# Altium PCB MainBoard.PcbDoc
Units mil, origin at the board's own origin, x right, y up, seen from the top; angles counter-clockwise.
Board outline 1122 x 925 mil, 2 copper layers (Top1, Bottom4), stack 42.17 mil thick; 52 components, 58 nets, 260 pads, 115 vias.
Unrouted connection lines stored in the file: 80.
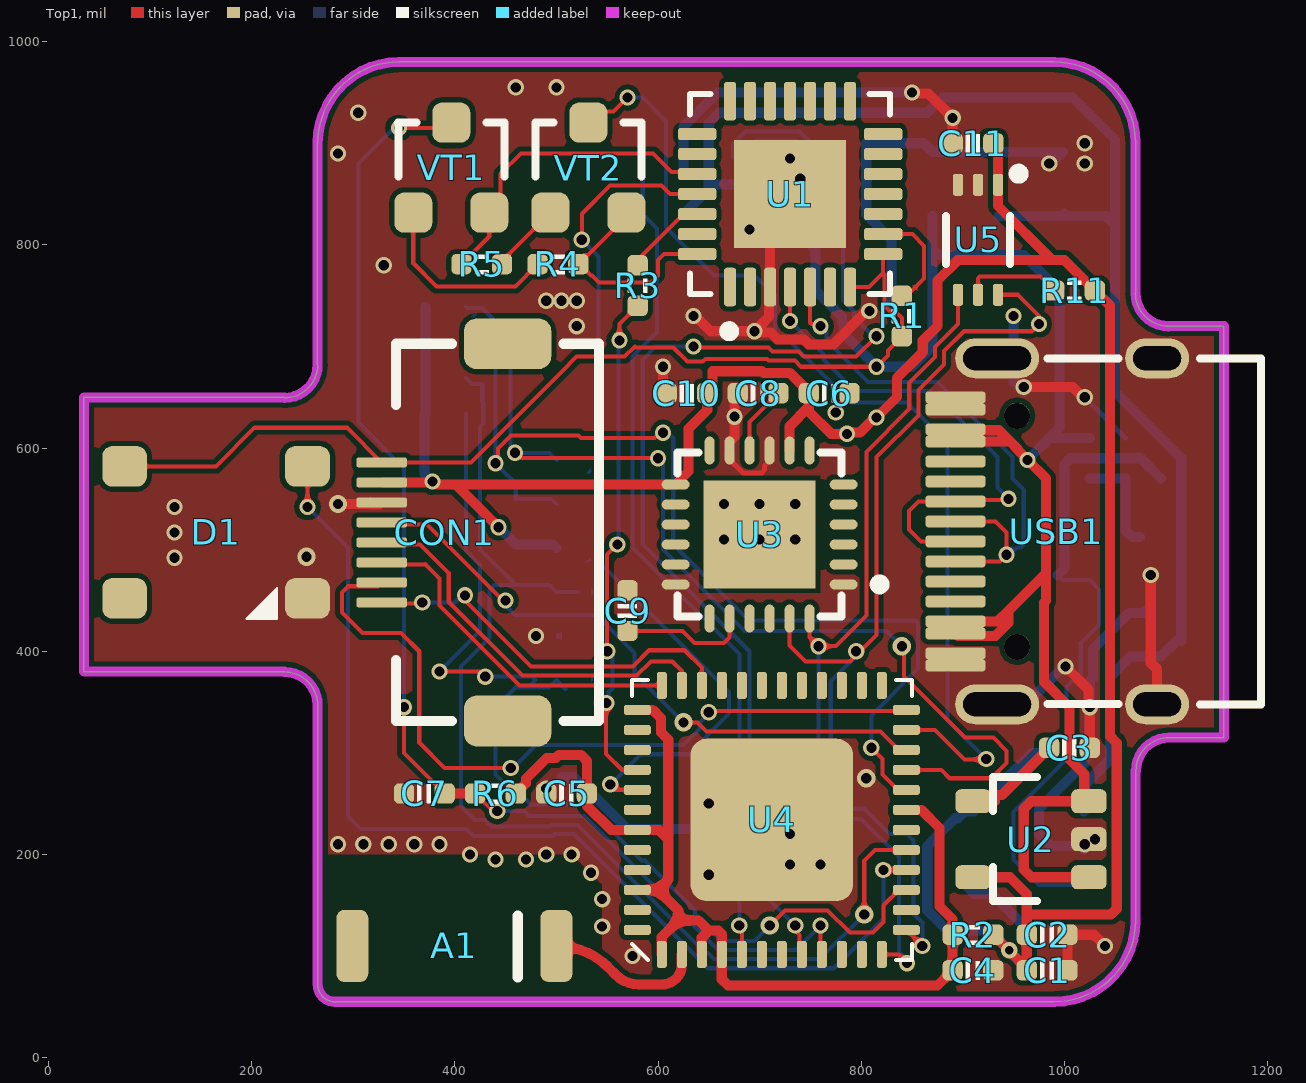
[diagram p0: Top1 view]
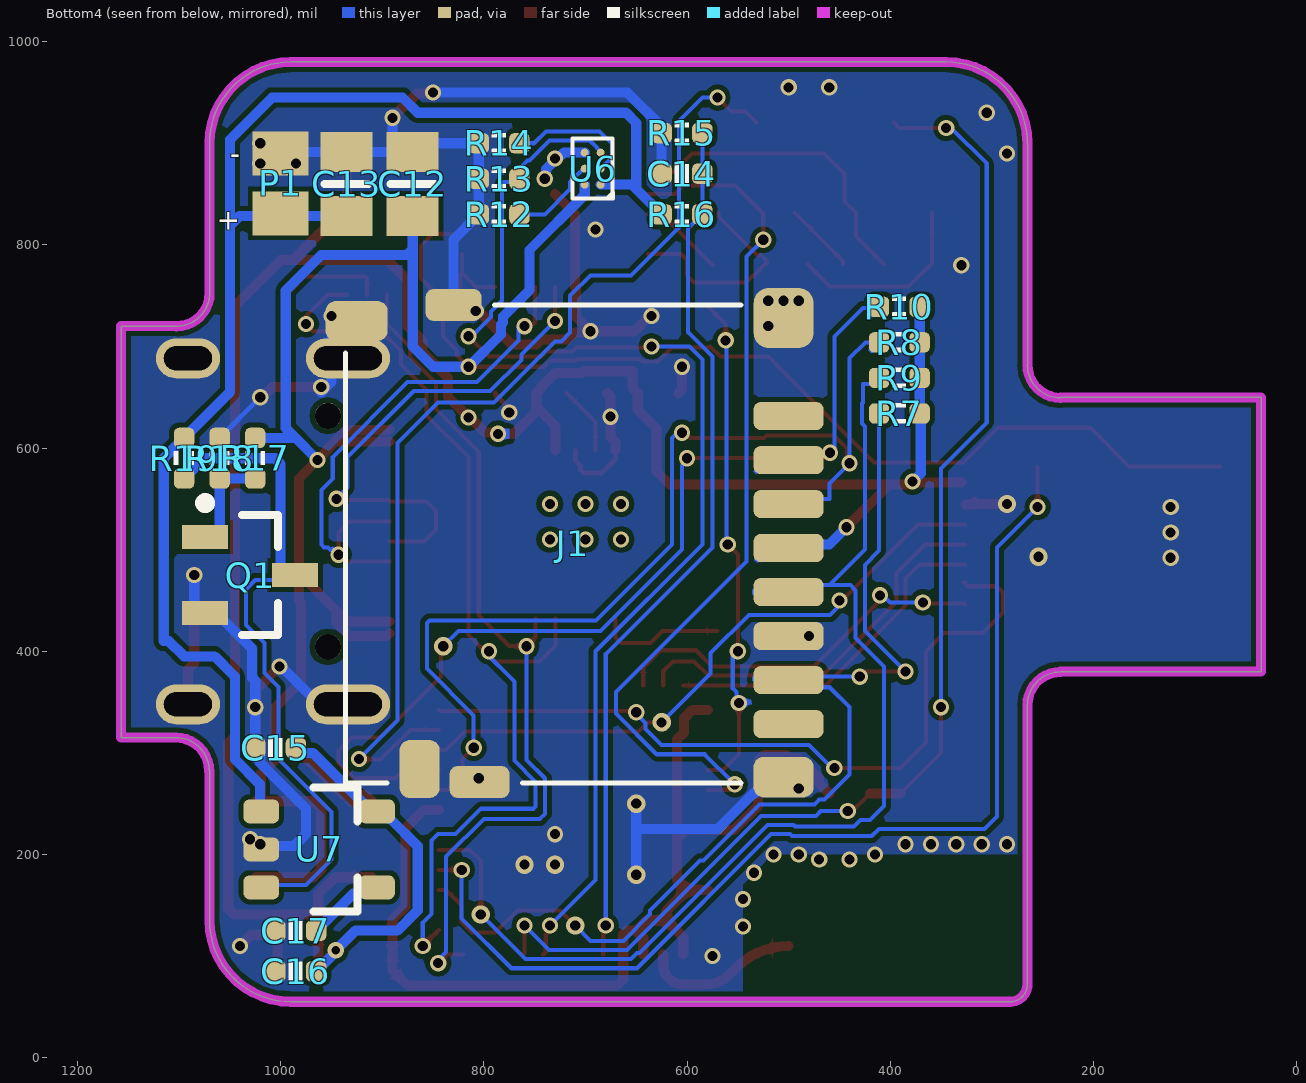
[diagram p1: Bottom4 view, seen from below]
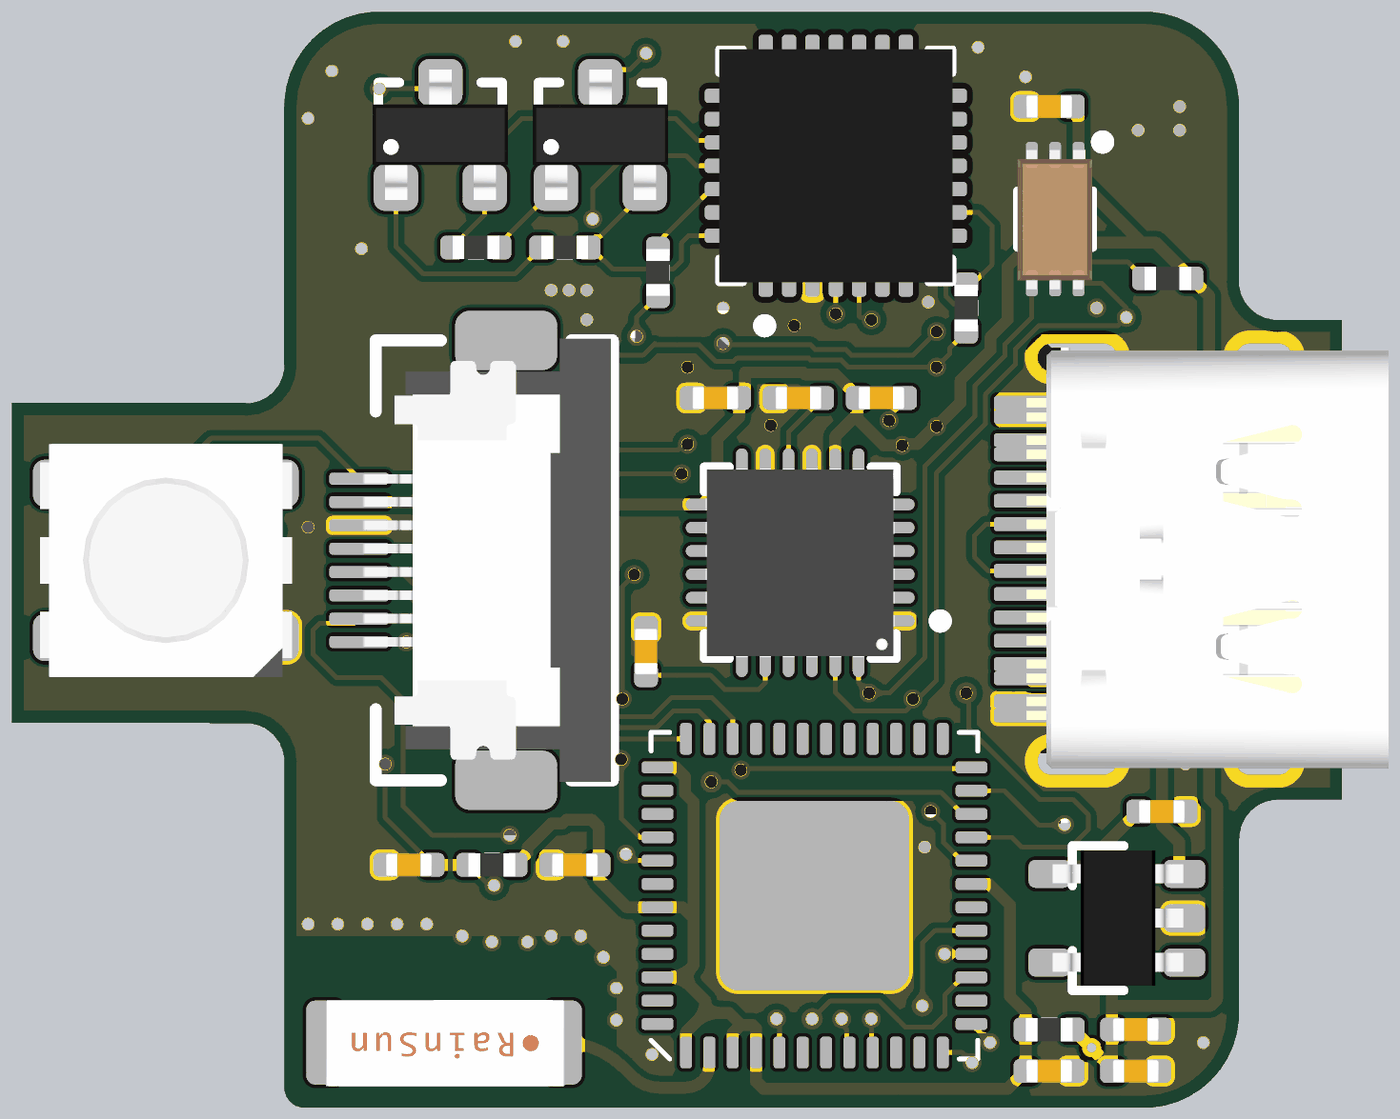
[diagram p2: 3D render of the assembled board from above, using the file's embedded part models]
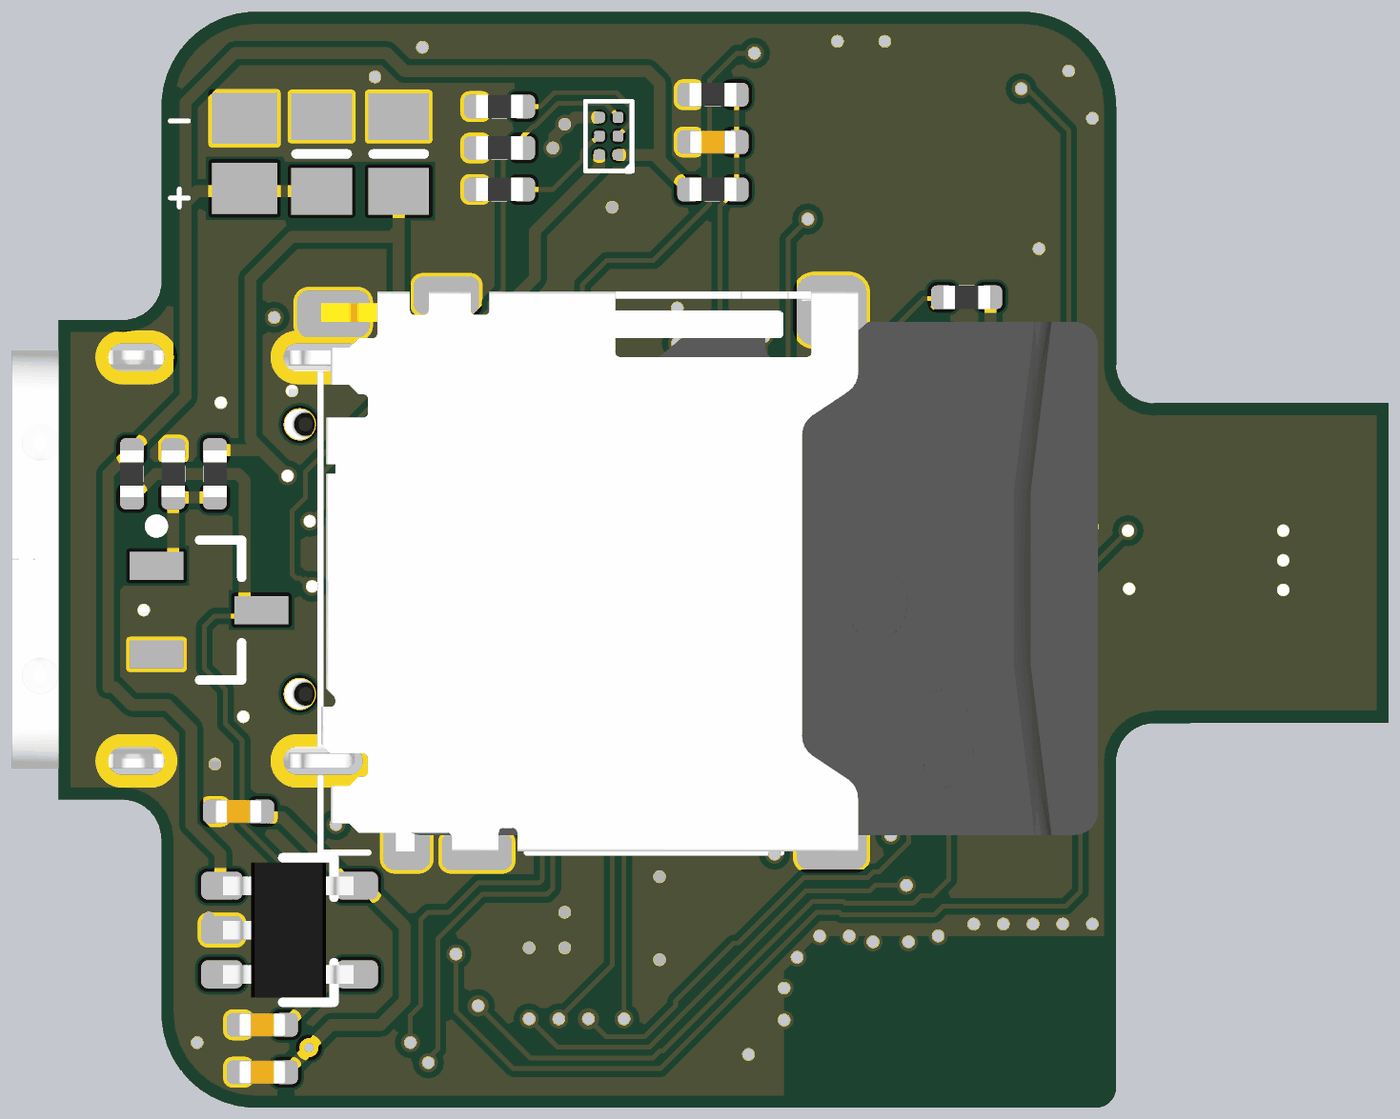
[diagram p3: 3D render of the assembled board from below, using the file's embedded part models]

## Layer stack, top to bottom
Top Solder: solder mask 0.4, Solder Resist, Dk 3.5
Top1: signal copper 1.4
Dielectric 2: core 39.37, PP-006, Dk 4.2
Bottom4: signal copper 1.4
Bottom Solder: solder mask 0.4, Solder Resist, Dk 3.5

## Board outline
232.4,379.6 cw(c232.4,347) 265,347 265,72.07 ccw(c282.07,72.07) 282.07,55 990,55 ccw(c990,135) 1070,135 1070,282.4 1070.4,282.4 cw(c1103,282.4) 1103,315 1157,315 1157,720 1102.5,720 1102.5,719.9 cw(c1102.5,752.5) 1069.9,752.5 1070,752.5 1070,900 ccw(c990,900) 990,980 345,980 ccw(c345,900) 265,900 264.82,900 264.82,682 265,682 cw(c232.4,682) 232.4,649.4 232.4,649.82 35,649.82 35,380

## Design rules (kind name [scope] priority, off if disabled: settings)
Clearance [All] p1: gap=5 ignorepadtopadclearanceinfootprint=FALSE
ComponentClearance [All] p1: gap=0 collisioncheckmode=3 verticalgap=0 showdistances=FALSE
DiffPairsRouting [All] p1: maxlimit=9 minlimit=9 mostfreqgap=9 toplayer_minwidth=4 toplayer_maxwidth=4 toplayer_prefwidth=4 bottomlayer_minwidth=4 bottomlayer_maxwidth=4 bottomlayer_prefwidth=4 maxuncoupledlength=500
FanoutControl Fanout_BGA [All] p1: bgadir=Out bgaviamode=Centered fanoutstyle=Auto fanoutdirection=Alternating viagrid=1 // Fanout_BGA (Default Rule)
HoleSize [All] p1: absolutevalues=TRUE maxlimit=10000 minlimit=8 maxpercent=80.000 minpercent=20.000
MinimumSolderMaskSliver [All] p1 off: minsoldermaskwidth=2
PlaneClearance [All] p1: clearance=8
PlaneConnect [All] p1: planeconnectstyle=Direct reliefexpansion=20 reliefentries=4 reliefconductorwidth=10 reliefairgap=10
PolygonConnect [All] p1: connectstyle=Direct reliefconductorwidth=10 reliefentries=4 polygonreliefangle="90 Angle" airgapwidth=10
RoutingVias [All] p1: holewidth=8 width=16 viastyle="Through Hole" minholewidth=6 minwidth=12 maxholewidth=28 maxwidth=50
SilkToBoardRegionClearance [All] p1 off:
SilkToSilkClearance [All] p1: silktosilkclearance=0
SilkToSolderMaskClearance [IsPad] p1: minsilkscreentomaskgap=0 clearancetoexposedcopper=TRUE
SolderMaskExpansion [All] p1: expansion=3
Width [All] p1: maxlimit=10000 minlimit=4 preferedwidth=4
20 further rules are at their usual default settings.

## Components (designator, comment, footprint, x,y, rotation, side; value= is the part's Value field where it differs from the comment)
A1 "RAINSUN" ANT-Rainsun-AN5120 400,110 r180 top
C1 "0.1uF" CAP_0402 983,86 r180 top value=0.1u
C2 "10uF" CAP_0402 983,121 r180 top value=0.1u
C3 "10nF" CAP_0402 1005,305 r180 top value=0.1u
C4 "10uF" CAP_0402 910,86 r180 top value=0.1u
C5 "0.1uF" CAP_0402 510,260 r0 top value=0.1u
C6 "10nF" CAP_0402 768.5,654 r0 top value=0.1u
C7 "0.1uF" CAP_0402 370,260 r180 top value=0.1u
C8 "0.1uF" CAP_0402 698.5,654 r180 top value=0.1u
C9 "2.2nF" CAP_0402 570,440 r270 top value=0.1u
C10 "0.1uF" CAP_0402 628.5,654 r0 top value=0.1u
C11 "0.1uF" CAP_0402 910,900 r180 top value=0.1u
C12 "Cap Pol1" 6-0805_L 870,860 r90 bottom value=1uf
C13 "Cap Pol1" 6-0805_L 935,860 r90 bottom value=1uf
C14 "0.1uf" CAP_0402 605,870 r180 bottom value=0.1u
C15 "10uF" CAP_0402 1005,305 r180 bottom value=0.1u
C16 "0.1uF" CAP_0402 985,85 r180 bottom value=0.1u
C17 "10nF" CAP_0402 985,125 r180 bottom value=0.1u
CON1 "FFC_0.5_8" FFC_0.5_8 417,517 r90 top
D1 "RGB" LED_5050_WS2812B 165,517 r0 top
J1 "TF-Socket" "TF-Card-Amphenol with TF" 500,501.61 r90 bottom locked
P1 "Battery" C0805 1000,860.47 r270 bottom
Q1 "NPN" SOT-23_N 1030,475 r180 bottom
R1 "10K" RES_0402 840,730 r90 top value=22R
R2 "0R" RES_0402 910,121 r180 top value=22R
R3 "200R" RES_0402 580,760 r90 top value=22R
R4 "12K" RES_0402 501.5,781 r180 top value=22R
R5 "12K" RES_0402 426.5,781 r0 top value=22R
R6 "10K" RES_0402 440,260 r180 top value=22R
R7 "10K" RES_0402 391,634 r0 bottom value=22R
R8 "10K" RES_0402 391,704 r0 bottom value=22R
R9 "10K" RES_0402 391,669 r0 bottom value=22R
R10 "10K" RES_0402 391,739 r0 bottom value=22R
R11 "10K" RES_0402 1010,755 r0 top value=22R
R12 "1.35K" RES_0402 785,830 r0 bottom value=22R
R13 "6K" RES_0402 785,865 r0 bottom value=22R
R14 "10K" RES_0402 785,900 r0 bottom value=22R
R15 "10K" RES_0402 605,910 r0 bottom value=22R
R16 "33K" RES_0402 605,830 r180 bottom value=22R
R17 "4K" RES_0402 1025,590 r270 bottom value=22R
R18 "6K" RES_0402 1060,590 r90 bottom value=22R
R19 "10K" RES_0402 1095,590 r270 bottom value=22R
U1 "CP2102" QFN-28 730,850 r90 top value=Value
U2 "LP2992 3V3" SOT23-5 965,215 r180 top
U3 "MPU6050" QFN-24 700,515 r180 top
U4 "ESP32_SIP" QFN-48_7X7 712,234 r90 top
U5 "BH1750FVI-TR" BH1750FVI 915,805 r270 top
U6 "BQ2510" BQ2510 696.06,873.42 r90 bottom
U7 "LP2992 3V3" SOT23-5 960,205 r180 bottom
USB1 "Type-C" Type-C-TOP 992,518 r0 top
VT1 "S8050" SMT_TRIODE_NPN 396.5,876 r0 top
VT2 "S8050" SMT_TRIODE_NPN 531.5,876 r0 top

## Footprints (in the part's own frame and the unit in brackets; to place one, negate y for a bottom-side part, rotate by r counter-clockwise, add the part's x,y. Pads: shape width x height; smd on the part's side, far side on the other; paste and mask are expansions set on the pad)
6-0805_L [mm] "Chip Resistor, Body 2.0x1.2mm, IPC High Density"
  rect 1x1.3 smd: 1(-0.8,0) 2(0.8,0)
  silkscreen extent 0,-0.55 0,0.55, body extent -1.07,-0.7 1.07,0.7, height 0.7
ANT-Rainsun-AN5120 [mm] "选择焊盘"
  rrect50% 0.8x1.8 smd: 1(-2.54,0) ""(2.563,0)
  silkscreen extent -1.57,-0.76 -1.57,0.79, body extent -2.57,-0.91 2.54,0.94, height 1.32
BH1750FVI [mm]
  rrect50% 0.55x0.25 smd paste+0 mask+0: 1(-1.375,0.5) 2(-1.375,0) 3(-1.375,-0.5) 4(1.375,-0.5) 5(1.375,0) 6(1.375,0.5)
  silkscreen extent -1.78,-0.8 0.6,1.14, body extent -1.49,-0.81 1.51,0.79, height 0.77
BQ2510 [mm]
  round 0.2 smd: A1(-0.36,-0.281) A2(-0.36,0.119) B1(0.04,-0.281) B2(0.04,0.119) C1(0.44,-0.281) C2(0.44,0.119)
  silkscreen extent -0.71,-0.58 0.79,0.42
C0805 [mm] "Chip Capacitor, Body 2.0x1.3mm, IPC High Density"
  rect 1.1x1.4 smd: 1(-0.75,0) 2(0.75,0)
  body extent -1.1,-0.72 1.1,0.72, height 1.4
CAP_0402 [mil]
  rrect50% 20x20 smd: 1(-20,0) 2(20,0)
  silkscreen extent -7,-9 7,9, body extent -20,-10 20,10, height 20
FFC_0.5_8 [mil]
  rrect50% 50x86 smd: 0(-185.63,-35) 0(185.63,-35)
  rrect50% 10x50 smd: 1(-68.9,89) 2(-49.21,89) 3(-29.53,89) 4(-9.84,89) 5(9.84,89) 6(29.53,89) 7(49.21,89) 8(68.9,89)
  silkscreen extent -186,-125 186,75, body extent -187,-124 187,87, height 82
LED_5050_WS2812B [mil]
  rrect50% 44x40 smd: 1(-90,65) 2(-90,-65) 3(90,-65) 4(90,65)
  silkscreen extent 30,-85 60,-55, body extent -106,-98 106,98, height 69
QFN-24 [mm] "QFN, 24-Leads, Body 4.1x4.1mm (max), Pitch 0.50mm, IPC Low Density"
  oval 0.7x0.25 smd: 1(-2.1,1.25) 2(-2.1,0.75) 3(-2.1,0.25) 4(-2.1,-0.25) 5(-2.1,-0.75) 6(-2.1,-1.25) 13(2.1,-1.25) 14(2.1,-0.75) 15(2.1,-0.25) 16(2.1,0.25) 17(2.1,0.75) 18(2.1,1.25)
  oval 0.25x0.7 smd: 7(-1.25,-2.1) 8(-0.75,-2.1) 9(-0.25,-2.1) 10(0.25,-2.1) 11(0.75,-2.1) 12(1.25,-2.1) 19(1.25,2.1) 20(0.75,2.1) 21(0.25,2.1) 22(-0.25,2.1) 23(-0.75,2.1) 24(-1.25,2.1)
  rect 2.8x2.7 smd: ""(0,0)
  silkscreen extent -3.13,-2.05 2.05,2.05, body extent -2.02,-2.02 2.02,2.02, height 0.95
QFN-28 [mil]
  rrect50% 38x12 smd mask+5: 1(-91.5,59.06) 2(-91.5,39.37) 3(-91.5,19.69) 4(-91.5,0) 5(-91.5,-19.68) 6(-91.5,-39.37) 7(-91.5,-59.05) 15(91.5,-59.05) 16(91.5,-39.37) 17(91.5,-19.68) 18(91.5,0) 19(91.5,19.69) 20(91.5,39.37) 21(91.5,59.06)
  rrect50% 12x38 smd mask+5: 8(-59.05,-91.5) 9(-39.37,-91.5) 10(-19.68,-91.5) 11(0,-91.5) 12(19.69,-91.5) 13(39.37,-91.5) 14(59.06,-91.5) 22(59.06,91.5) 23(39.37,91.5) 24(19.69,91.5) 25(0,91.5) 26(-19.68,91.5) 27(-39.37,91.5) 28(-59.05,91.5)
  rect 106.3x110.24 smd: 29(0,0)
  silkscreen extent -140,-99 98,98, body extent -98,-98 98,98, height 35
QFN-48_7X7 [mm]
  rrect20% 4.064x4.064 smd: 0(0,0)
  rrect50% 0.675x0.25 smd: 1(-3.363,2.75) 2(-3.363,2.25) 3(-3.363,1.75) 4(-3.363,1.25) 5(-3.363,0.75) 6(-3.363,0.25) 7(-3.363,-0.25) 8(-3.363,-0.75) 9(-3.363,-1.25) 10(-3.363,-1.75) 11(-3.363,-2.25) 12(-3.363,-2.75) 25(3.362,-2.75) 26(3.362,-2.25) 27(3.362,-1.75) 28(3.362,-1.25) 29(3.362,-0.75) 30(3.362,-0.25) 31(3.362,0.25) 32(3.362,0.75) 33(3.362,1.25) 34(3.362,1.75) 35(3.362,2.25) 36(3.362,2.75)
  rrect50% 0.25x0.675 smd: 13(-2.75,-3.363) 14(-2.25,-3.363) 15(-1.75,-3.363) 16(-1.25,-3.363) 17(-0.75,-3.363) 18(-0.25,-3.363) 19(0.25,-3.363) 20(0.75,-3.363) 21(1.25,-3.363) 22(1.75,-3.363) 23(2.25,-3.363) 24(2.75,-3.363) 37(2.75,3.362) 38(2.25,3.362) 39(1.75,3.362) 40(1.25,3.362) 41(0.75,3.362) 42(0.25,3.362) 43(-0.25,3.362) 44(-0.75,3.362) 45(-1.25,3.362) 46(-1.75,3.362) 47(-2.25,3.362) 48(-2.75,3.362)
  silkscreen extent -3.5,-3.5 3.5,3.5, body extent -3.5,-3.5 3.5,3.5, height 1
RES_0402 [mil]
  rrect50% 20x20 smd: 1(-20,0) 2(20,0)
  silkscreen extent -7,-10 7,10, body extent -20,-10 20,10, height 14
SMT_TRIODE_NPN [mm] "Surface mount NPN transistor, package SOT-23"
  rrect50% 0.95x1 smd: 1(-0.95,-1.125) 2(0.95,-1.125) 3(0,1.125)
  silkscreen extent -1.33,-0.23 1.32,1.12, body extent -1.45,-1.4 1.45,1.4, height 1.3
SOT23-5 [mm] "SOT23, 3-Leads, Body 3.1x3.0mm (max), Pitch 0.95mm, IPC Medium Density"
  rrect50% 0.889x0.6 smd: 1(-1.5,0.95) 2(-1.5,0) 3(-1.5,-0.95) 4(1.396,-0.95) 5(1.396,0.95)
  silkscreen extent -0.2,-1.55 0.9,1.55, body extent -1.48,-1.45 1.32,1.45, height 1.2
SOT-23_N [mm] "SOT23, 3-Leads, Body 2.9x1.3mm, Pitch 0.95mm, Lead Span 2.5mm, IPC Medium Density"
  rect 1.15x0.6 smd: 1(-1.125,0.95) 2(-1.125,-0.95) 3(1.125,0)
  silkscreen extent -1.25,-1.5 0.7,1.92, body extent -0.7,-1.5 0.7,1.5, height 1.1
"TF-Card-Amphenol with TF" [mm]
  rrect50% 0.7x1.75 smd: 1(3.3,0) 2(2.2,0) 3(1.1,0) 4(0,0) 5(-1.1,0) 6(-2.2,0) 7(-3.3,0) 8(-4.4,0)
  rrect50% 1x1.55 smd: 9(5.675,10.8)
  rrect50% 1.45x1 smd: 10(-5.525,9.225)
  rrect50% 1.5x1.5 smd: S1(5.75,0.125)
  rrect50% 1.016x1.5 smd: S2(-5.727,0.125)
  rrect50% 0.8x1.4 smd: S3(6.075,8.375)
  rrect50% 0.8x1.5 smd: S4(-5.85,7.725)
  silkscreen extent -5.87,1.19 6.07,11.07, body extent -5.85,-5.58 6.15,11.06, height 1.69
Type-C-TOP [mm]
  round 0.65 hole 0.65: 0(-0.98,-2.89) 0(-0.98,2.89)
  oval 1.6x1 hole 0.6 slot 1.2 at 0 deg: 1(2.52,4.325) 2(2.52,-4.325)
  oval 2.1x1 hole 0.6 slot 1.7 at 0 deg: 3(-1.48,-4.325) 4(-1.48,4.325)
  rrect50% 1.5x0.3 smd: A1(-2.52,-3.35) A4(-2.52,-2.55) A5(-2.52,-1.25) A6(-2.52,-0.25) A7(-2.52,0.25) A8(-2.52,1.25) A9(-2.52,2.55) A12(-2.52,3.35) B1(-2.52,3.05) B4(-2.52,2.25) B5(-2.52,1.75) B6(-2.52,0.75) B7(-2.52,-0.75) B8(-2.52,-1.75) B9(-2.52,-2.25) B12(-2.52,-3.05)
  silkscreen extent -0.22,-4.33 5.12,4.33, body extent -2.57,-4.48 5.18,4.48, height 3.26

## Part data
A1: library part ANT-Rainsun-AP5120
C1 C2 C3 C4 C5 C6 C7 C8 C9 C10 C11 C14 C15 C16 C17: library part ??-0402, "Capacitor"
C12 C13: "Polarized Capacitor (Radial)", LatestRevisionDate=17-Jul-2002, LatestRevisionNote="Re-released for DXP Platform.", PackageDescription="Polarized Capacitor (Radial); 2 Leads", PackageReference=RB7.6-15, Published=8-Jun-2000, Publisher="Altium Limited"
CON1: "FFC", System=Connector
D1: library part LED_5050_WS2812B, "LED", Type=5050
J1: "10 _8 + 2_ Position Card Connector Secure Digital - microSD™ Surface Mount, Right Angle Gold", Package=None, Availability=Unavailable, MF="Amphenol Commercial Products", MP=1140084168, Price=None, SnapEDA_Link=https://www.snapeda.com/parts/1140084168/Amphenol/view-part/4544529/?ref=snap
P1: library part "Header 2", "Header, 2-Pin", LatestRevisionDate=17-Jul-2002, LatestRevisionNote="Re-released for DXP Platform.", Publisher="Altium Limited"
Q1: "NPN Bipolar Transistor", Code_JEDEC=TO-226-AA, LatestRevisionDate=17-Jul-2002, LatestRevisionNote="Re-released for DXP Platform.", PackageDescription="TO, Flat Index; 3 In-Line, Axial Leads; Body Dia. 4.8mm; Leads 0.55 x 0.51 mm (max)", PackageReference=TO-226-AA, Published=8-Jun-2000, Publisher="Altium Limited"
R1 R2 R3 R4 R5 R6 R7 R8 R9 R10 R11 R12 R13 R14 R15 R16 R17 R18 R19: library part ??-0402, "Resistor"
U1: "USB?TTL", MFG #1="SILICON LABS", PART DESC="SINGLE-CHIP USB TO UART BRIDGE, QFN28, RoHS.", PART NUMBER=CP2102, RefDes=RefDes, Type=DEV
U2 U7: library part LP2992, "LDO"
U3: "?????"
U4: library part ESP32-PICO
USB1: library part USB-Type-C-TOP
VT1 VT2: library part SMT_TRIODE_NPN, "Surface mount NPN transistor, package SOT-23"

## Via types
v1: diameter 16, hole 10, Top1 to Bottom4, tented both sides, 103 vias
v2: diameter 18, hole 10, Top1 to Bottom4, tented both sides, 11 vias
v3: diameter 16, hole 8, Top1 to Bottom4, 1 vias

## Nets (pads, with @x,y where several pads share a name; then routed paths per layer and width w, separated by ;. In a path a pad name is that pad's centre, name@x,y a point inside that pad or via, vN(x,y) a via of type N, cw(c..) or ccw(c..) an arc to the next point about the centre after c; other vN are vias at no path point)
3V3: C1.2 C2.2 C6.1 C10.2 C11.1 C15.2 C16.2 CON1.7 J1.4 R2.1 R7.1 R8.1 R9.1 R10.1 R11.2 U2.5 U3.8 U3.13 U5.1 U7.5 | length 2684.4
  Top1 w10: CON1.7@330,566.21 380.41,566.21 382.41,564.21 400.79,564.21 ; v1(443,522) 400.79,564.21 ; U3.8 729.53,621.53 748.5,640.5 ; U2.5 946.4,177.6 963,161 963,141 ; R2.1 945.5,105.5 C1.2@963,88 ; C11.1 934.68,895.32 U5.1 934.68,838.32 988,785 ; C1.2 C1.2@963,88 ; 400.79,564.21 U3.13 630,576.89 630,619 648.5,637.5 C10.2 653.5,659 653.5,675.66 702.22,675.66 703.88,674 729.71,674 743.5,660.21 743.5,659 C6.1 748.5,640.5 ; 748.5,640.5 748.5,636.04 770.55,614 v1(786,614) 787.15,615.15 798.52,615.15 813.38,630 v1(815,630) 835.26,650.26 835.26,669.04 860.61,694.39 860.61,705.61 875,720 875,765 895,785 988,785 ; C1.2@963,88 C2.2 963,141 ; 963,141 1046,141 1051.55,146.55 1051.55,309.66 1045,316.21 1045,740 R11.2 1000,785 988,785
  Bottom4 w10: R10.1 R8.1 R9.1 R7.1 370,633 370,575 v1@380,565 ; v1@445,520 460,505 496.62,505 J1.4 ; C16.2 945.73,104.27 v3(945.73,105.73) 926.46,125 885,125 865,145 865,208.04 892.87,235.9 894.75,235.9 895,235.66 901.74,242.4 U7.5 910.74,242.4 968.34,300 980,300 C15.2
  other v1: 378,567
3V3A: C4.2 C5.2 R2.2 R6.1 U4.1 U4.3 U4.4 U4.19 U4.37 U4.43 U4.46 | length 1070.7
  Top1 w10: R6.1 470,270 470,274.55 490.46,295 499.54,295 502.54,298 524.14,298 530,292.14 C5.2 530,248 553.84,224.16 U4.43 600.84,224.16 610,215 ; U4.46 599.9,165.1 ; U4.37 594.73,342.27 602.91,334.09 602.91,320.22 610,313.13 610,215 ; U4.1 603.73,118.73 620,135 ; U4.3 643.1,118.1 650,125 ; U4.19 859.16,243.84 877,226 877,149 890,136 R2.2 C4.2 875,71 669,71 662.79,77.21 U4.4 662.79,121.76 659.55,125 650,125 ; 599.9,165.1 610,175.21 610,215 ; 599.9,165.1 620,145 620,135 ; 620,135 640,135 650,125
BAT+: C13.1 P1.2 R16.1 R19.1 U6.A1 U7.1 | length 1434.9
  Bottom4 w10: R16.1 650,855 ; U6.A1 654.25,859.25 650,855 ; C13.1 P1.2@1002.44,828.5 ; P1.2 P1.2@1002.44,828.5 ; U7.1 1020.43,243.77 1020.43,269.21 1045,293.79 1045,375 1065,395 1095,395 1110,410 1115,410 1115,590 R19.1 1049.72,655.28 1049.72,819.14 ; 650,855 650,859.25 650,920 660,930 865,930 880,945 1008.35,945 1049.72,903.64 1049.72,819.14 ; P1.2@1002.44,828.5 1040.36,828.5 1049.72,819.14
BH_SCL: U3.23 U4.13 U5.6 | length 1017.6
  Top1 w4: U3.23 729.53,405.47 745,390 789,390 815,416 815,591 856.26,632.26 856.26,656.96 881.61,682.31 881.61,695.54 901.03,714.96 967.96,714.96 v1(975,722) 975,730 954.13,750.87 U5.6 ; U4.13 v1(860.11,110)
  Bottom4 w4: v1@800,400 770,370 770,292.27 749,271.27 749,247.34 751.34,245 802.73,245 827.73,220 845,220 851.41,213.59 851.41,141.62 860.11,132.91 v1(860.11,110)
  other v1: 795,400
BH_SDA: U3.24 U4.12 U5.4 | length 867.1
  Top1 w4: U3.24 749.21,413.79 v1(758,405) 775,405 805,435 805,596 847.26,638.26 847.26,664.07 872.61,689.42 872.61,699.27 895.31,721.98 U5.4 ; U4.12 836.38,101.62 v1(845,93)
  Bottom4 w4: v1(758,405) 758,293 740,275 740,240 745,235 800,235 837.05,197.95 837.05,104.2 845,96.25 v1(845,93)
CP_Rx: U1.25 U4.41 | length 855.2
  Top1 w4: v1(525,805) 525,830.62 552.78,858.39 603.61,858.39 612,850 U1.25 ; v1(553,269) 558.47,263.53 U4.41
  Bottom4 w4: v1(525,805) 541.6,788.4 541.6,488.4 670,360 670,338.79 629.82,298.61 582.61,298.61 v1(553,269)
CP_Tx: R3.1 U4.40 | length 495.1
  Top1 w4: v1(549,349) 549,299 564.79,283.21 U4.40 ; v1(550,400) 550,495 v1(560,505) ; v1(562,706) 562,722 R3.1
  Bottom4 w4: v1(549,349) 551.3,351.3 551.3,359.78 555,363.48 555,395 v1(550,400) ; v1(560,505) 561,506 561,705 v1(562,706)
DC: CON1.5 U4.22 | length 625
  Top1 w4: CON1.5@326,524.84 372.66,524.84 447.5,450 v1(450,450) ; v2(625,330) 638.79,330 647.79,321 819,321 837.1,302.9 U4.22
  Bottom4 w4: v1(450,450) 450,445 459.22,435.78 539.22,435.78 576.94,398.06 576.94,378.06 v2(625,330)
DTR: R4.1 U1.28 VT2.2 | length 217.5
  Top1 w4: VT2.2 568.9,827.69 531.21,790 527.19,790 521.5,784.31 R4.1 523.12,781 534.12,770 535,770 542,763 593,763 600,770 600,785 605.94,790.95 U1.28
EN: C7.1 R6.2 U4.9 VT1.3 | length 1237.4
  Top1 w4: v1(345,915) 391.21,915 VT1.3 ; v1(350,345) 350,300 C7.1 ; R6.2 441.83,238.17 v1(441.83,242.72) ; v1(760,130) 760,102.83 U4.9
  Top1 w10: C7.1 R6.2
  Bottom4 w4: v1@340,915 305,880 305,625 350,580 v1(350,345) ; v1(441.83,242.72) 468.41,242.72 473.12,238 527,238 659,106 736,106 v1(760,130)
FLASH_CLK: U4.31
FLASH_CS: U4.25
FLASH_SD0: U4.27
FLASH_SD1: U4.33
FLASH_SD2: U4.30
FLASH_SD3: U4.32
GND: C1.1 C2.1 C3.1 C4.1 C5.1 C6.2 C7.2 C8.2 C9.1 C10.1 C11.2 C12.2 C13.2 C14.1 C15.1 C16.1 C17.1 CON1.6 D1.3 J1.6 J1.9 J1.10 J1.S1 J1.S2 J1.S3 J1.S4 P1.1 Q1.2 R12.2 R13.2 R14.2 R15.2 R18.2 U1.3 U1.29 U2.2 U3.1 U3.9 U3.11 U3.18 U4.0 U5.2 U5.3 U6.C2 U7.2 USB1.1 USB1.2 USB1.3 USB1.4 USB1.A1 USB1.A12 USB1.B1 USB1.B12 | length 2568.3
  Top1 w5: U3.11 670.47,588.82 683.64,575.65 702.07,575.65 705,578.58 705,582.67 709.84,587.51 U3.9 ; v1(775,635) 777.1,637.1 777.1,641.25 788.5,652.65 C6.2
  Top1 w10: v2(285,545) CON1.6@315,545 ; CON1.6@317,547 317,544.53 CON1.6@326,544.53 ; v1@605,675 605,657.5 C10.1 ; v1(635,730) 636.62,730 651.62,715 v1(695,715) 696.15,713.85 710.69,713.85 717.55,707 743.38,707 748.38,702 772.46,702 805.46,735 v1(808,735) ; U3.11 670.47,606.38 675.24,611.14 675.24,650.73 C8.2 ; v1@700,715 700,720 709.31,729.31 709.31,757.5 U1.3 710.31,830.31 U1.29 ; v1(850,950) 851.15,948.85 866.15,948.85 v1(890,925) C11.2 ; v1(960,660) 1008.38,660 1018.38,650 v1(1020,650) ; v1(1001.08,385) 1023.85,362.23 1023.85,346.15 v1(1025,345) ; C1.1 C2.1 1029,121 v1@1035,115 ; C3.1 v1@1025,340 ; v1(1085,475) 1085,388.62 1091.21,382.41 USB1.2
  Bottom4 w5: v1@727.02,885 v1(730,885) ; v1(1020,650) R18.2
  Bottom4 w10: J1.S2 517.15,276.14 532.15,261.14 533.56,261.14 569.7,225 650,225 ; C14.1 R15.2 625,916.21 658.79,950 v1(850,950) ; v2(650,180) 650,225 ; v2(650,250) 650,225 ; U6.C2 721.27,890.75 v1@727.02,885 ; v1(730,885) 730,883.38 738.85,874.52 738.85,866.15 v1(740,865) ; J1.S3 829.72,805.28 R12.2 R13.2 R14.2 861.5,900 C12.2 C12.2@875.31,891.5 ; v1(890,925) 890,906.18 C12.2@875.31,891.5 ; USB1.3 962.18,347.72 999.46,385 v1(1001.08,385) ; v1(950,730) 950,665 v1@960,655 ; v1(985,880) 987.01,880 998.5,891.5 C13.2 C12.2@875.31,891.5 ; U7.2 1015.61,208.45 986.55,208.45 975,220 975,245 1020,290 1020,300 C15.1 v1(1025,345) 1025,370.74 1028.08,373.82 1028.08,402.22 1063.46,437.6 1078.19,437.6 1085,444.41 v1(1085,475)
  other v1: 575,100 1040,110 545,129 545,156 534,182 440,195 470,195 415,200 490,200 515,200 285,210 310,210 335,210 360,210 385,210 1020,210 1030,215 730,220 490,265 480,415 124,492 124,517 124,542 675.24,630.94 605,680 520,720 490,745 505,745 520,745 330,780 690,815 1020,880 285,890 1020,900 305,930 460,955 500,955
  other v2: 730,190 760,190 805,275 254,493
GPIO0: U4.23 VT2.3 | length 1005.3
  Top1 w4: VT2.3@531.79,920 VT2.3 542.41,931.2 556.2,931.2 v1(570,945) ; U4.23 872.42,322.58 901.5,293.5 922.5,293.5 v1(923,294)
  Bottom4 w4: v1(570,945) 585,945 608,922 608,817 655,770 695,770 715,750 715,713.79 723.79,705 730,705 790,645 845,645 885,605 885,332 v1(923,294)
GPIO4: CON1.2 U4.24 | length 766.9
  Top1 w4: CON1.2@326,465.79 324.21,464 295,464 293.89,462.89 289,458 289,438 309,418 347,418 365,400 365,310 390,285 v1(455,285) ; CON1.2@326,467.79 CON1.2 ; v1(650,340) 651.13,341.13 843.25,341.13 U4.24
  Bottom4 w4: v1@455,280 v1(455,285) 457.39,285 480,307.61 625.23,307.61 641,323.37 641,329.2 650,338.2 v1(650,340)
GPIO5: CON1.1 U4.34 | length 381.9
  Top1 w4: CON1.1@326,446.1 327,447.1 366.9,447.1 v1(367.9,448.1) ; v1@410,456 v1(410,455) 410,450 475,385 575.27,385 591.27,401 626,401 643.1,383.9 U4.34
  Bottom4 w4: v1(367.9,448.1) 400.1,448.1 v1@407,455
GPIO9: U4.28
GPIO10: U4.29
GPIO12: U4.18
GPIO13: J1.3 R8.2 U4.20 | length 1005.8
  Top1 w4: v1(440,585) 442.5,587.5 442.5,599.77 455.23,612.5 521.89,612.5 524.39,610 596.75,610 601.75,615 v1(605,615) ; v1(810,305) 821,294 821,278.54 836.02,263.53 U4.20
  Bottom4 w4: R8.2 424.46,704 440,688.46 v1(440,585) 445,580 460,565 460,549.81 495.11,549.81 J1.3 ; v1@605,620 615,610 615,505 689.66,430.34 853.66,430.34 856,428 856,382.94 810,336.94 v1(810,305)
GPIO14: J1.5 R9.2 U4.17 | length 1126.5
  Top1 w4: v2(803,141) 803,194 813.47,204.47 U4.17
  Bottom4 w4: R9.2 417,663 427,663 427,644.97 428,643.97 428,624.03 425,621.03 425,500 460,465 ; J1.5@521.86,458.31 J1.5 493.31,465 460,465 ; v2(803,141) 759,97 655.27,97 649.14,103.14 646.81,103.14 520.94,229 495,229 493.72,227.72 435.62,227.72 429.44,233.89 419.89,233.89 406,247.79 406,384.94 434,412.94 434,459.76 439.24,465 460,465
GPIO15: J1.2 R10.2 U4.21 | length 1003.4
  Top1 w4: v1(459.32,595.38) 459.62,595.38 465,590 v1(600,590) ; v2(840,405) 842,403 842,375 902,315 930,315 943,302 943,290 928,275 887,275 878.79,283.21 U4.21
  Bottom4 w4: R10.2 412,738 427,738 455,710 455,601.21 461.21,595 493.23,595 J1.2 ; v1@600,585 602.66,585 605,582.66 605,500 685,420 825,420 v2(840,405)
GPIO18: CON1.4 U4.35 | length 391.4
  Top1 w4: CON1.4@326,505.16 365.84,505.16 394,477 394,448.73 466.73,376 579,376 593,390 614,390 623.42,380.58 U4.35
GPIO19: U4.38
GPIO21: U4.42
GPIO22: U4.39
GPIO23: CON1.3 U4.36 | length 343.1
  Top1 w4: CON1.3@326,485.47 370.47,485.47 370.88,485.88 385,471.75 385,445 463.62,366.38 U4.36
GPIO25: U4.14
GPIO26: J1.7 R7.2 U4.15 | length 1057.3
  Top1 w4: v1(385,380) 425,380 v1(430,375) ; v2(710,130) 725,145 767,145 789,123 811.63,123 822,133.37 822,150 837.1,165.1 U4.15
  Bottom4 w4: v1(385,380) 425,420 425,485 411,499 R7.2 ; v1(430,375) 475,375 475.51,375.51 479.33,371.69 J1.7@472.19,364.55 ; J1.7@508.69,363 J1.7 492.86,364.55 J1.7@472.19,364.55 ; v2(710,130) 695,115 662.73,115 636.36,141.36 636.36,145 587.36,194 583.73,194 528.59,249.14 474.71,249.14 469.85,254 464.79,254 440,278.79 440,345 459.55,364.55 J1.7@472.19,364.55
GPIO27: D1.4 U4.16 | length 1042.3
  Top1 w4: v1(255,542) D1.4 ; v1(821.79,184.79) U4.16
  Bottom4 w4: v1(255,542) 295,502 295,237.34 307.34,225 411.21,225 418.21,218 496.73,218 498.73,220 517.21,220 649.21,88 773,88 821.79,136.79 v1(821.79,184.79)
GPIO34: U4.10
GPIO35: U4.11
GPIO37: U4.6
GPIO38: U4.7
NetA1_1: A1.1 U4.2 | length 247.8
  Top1 w10: A1.1 cw(c500,37.57) 551.21,88.79 558.81,81.19 ccw(c581,103.38) 581,72 603.51,72 ; U4.2 U4.2@623.42,91.08 ; 603.51,72 ccw(c603.51,92.49) 618,78 ; 603.51,72 ccw(c603.51,92.49) 618,78 ; 603.51,72 ccw(c603.51,92.49) 618,78 ; 603.51,72 ccw(c603.51,92.49) 618,78 ; 618,78 ccw(c604.92,91.08) U4.2@623.42,91.08 ; 618,78 ccw(c604.92,91.08) U4.2@623.42,91.08 ; 618,78 ccw(c604.92,91.08) U4.2@623.42,91.08 ; 618,78 ccw(c604.92,91.08) U4.2@623.42,91.08
NetC3_2: C3.2 U2.4 | length 118.1
  Top1 w10: 931.4,252.4 U2.4 916.31,258.65 938.65,258.65 C3.2
NetC8_1: C8.1 U3.10 | length 68.1
  Top1 w4: U3.10 690.16,625.66 C8.1
NetC9_2: C9.2 U3.20 | length 126.6
  Top1 w4: C9.2 624,420 636,408 665,408 670.47,413.47 U3.20
NetC17_2: C17.2 U7.4 | length 77.6
  Bottom4 w10: U7.4 911.31,161.35 928.65,161.35 C17.2
NetQ1_1: Q1.1 R17.2 R18.1 | length 102.9
  Bottom4 w10: R17.2 R18.1 1060,519.21 1066.81,512.4 Q1.1
NetQ1_3: Q1.3 R19.2 U7.3 | length 654.6
  Bottom4 w4: Q1.3@993.19,475 998.19,470 1025,470 1034.01,460.99 1034.01,425.99 1016.08,408.05 1016.08,378.79 1002,364.71 1002,293.97 950,241.97 950,195 975,170 U7.3@1010.97,170 ; U7.3@1010.97,170 1013.37,167.6 U7.3 1016.65,170 U7.3@1010.97,170
  Bottom4 w10: Q1.3@993.19,475 1000,481.81 1000,584.14 1005.86,590 1075,590 R19.2
NetR1_2: R1.2 U1.9 | length 101.4
  Top1 w4: U1.9 850.37,810.63 862,799 862,767 R1.2@845,750
NetR3_2: R3.2 U1.26 | length 84.6
  Top1 w4: R3.2@574.73,780 625.04,830.32 U1.26
NetR4_2: R4.2 VT1.1 | length 190.8
  Top1 w4: VT1.1 359.1,781.9 382,759 459.5,759 R4.2
NetR5_2: R5.2 VT2.1 | length 70.4
  Top1 w4: R5.2 446.5,784.11 VT2.1
NetR11_1: R11.1 U5.5 | length 97.5
  Top1 w4: U5.5 915,767 916.69,768.69 976.31,768.69 R11.1
NetR12_1: R12.1 U6.B2 | length 88
  Bottom4 w4: U6.B2@701.48,874.26 U6.B2 701.79,875 705.54,871.25 705.71,871.25 715,861.96 715,855 740,830 R12.1
NetR14_1: R14.1 U6.B1 | length 130
  Bottom4 w4: U6.B1 674.06,885.94 674.06,899.67 686.15,911.75 739.01,911.75 750.76,900 R14.1
RTS: R5.1 U1.24 VT1.2 | length 315.1
  Top1 w4: R5.1 433.9,808.4 VT1.2 445,842.81 445,870 465,890 595,890 613.5,871.5 636.68,871.5 U1.24
SENSOR_VN: R13.1 U4.8 U6.C1 | length 1184.2
  Top1 w4: v1@641,699 708.57,699 712.57,695 738.41,695 743.41,690 795,690 v1(815,710) ; v1(735,130) 735,125 739.1,120.9 739.1,104.05 U4.8
  Bottom4 w4: v1(635,700) 597.73,700 585,687.27 585,505 690,400 690,175 v1(735,130) ; U6.C1 685,891.8 688.74,895.54 688.74,895.72 695.77,902.75 735.28,902.75 755.03,883 757,883 765,875 R13.1 767.97,862.03 781,862.03 782,861.03 782,745.43 793,734.43 793,728.79 801.79,720 801.92,720 811.92,710 v1(815,710)
SENSOR_VP: C14.2 R15.1 R16.2 U4.5 | length 870.1
  Top1 w4: U4.5 v1@682.47,132.53
  Bottom4 w4: R15.1 C14.2 R16.2 599,816 599,714 575,690 575,502.27 680,397.27 v1(680,130)
USB-PWR-DM: U1.5 USB1.A7 USB1.B7 | length 553
  Top1 w4: U1.5 749.68,723.32 751,722 763,722 761,720 v1(760,720) ; USB1.B7 936.47,488.47 v1(943,495) 943,517 932.16,527.84 USB1.A7
  Bottom4 w4: v1(760,720) 765,720 765.79,719.21 765.79,706 806.79,665 875,665 948.71,591.29 948.71,570 960,558.71 960,505 957.17,502.17 953.42,502.17 946.25,495 v1(943,495) 943,495.58 948.71,501.29
USB-PWR-DP: U1.4 USB1.A6 USB1.B6 | length 513.2
  Top1 w4: v1(730,725) U1.4 ; USB1.A6 858.84,508.16 846.99,520.01 846.99,537.99 856.53,547.53 USB1.B6 894.02,548.76 943.76,548.76 v1(945,550)
  Bottom4 w4: v1(730,725) 763.15,691.85 763.15,686.85 794,656 869,656 934,591 934,561 v1(945,550)
VDD_5V: C12.1 CON1.8 D1.1 R1.1 R17.1 U1.7 U1.8 U2.1 U2.3 U6.A2 USB1.A4 USB1.A9 USB1.B4 USB1.B9 | length 2702.3
  Top1 w4: D1.1 165,582 203,620 293.9,620 CON1.8 415.9,585.9 505,675 520,690 567.21,690 577.21,700 578.43,698.79 615,698.79 628.79,685 644.03,685 646.69,687.66 707.19,687.66 708.85,686 734.68,686 740.68,680 v1(815,680) 826.22,691.22 826.22,696.22 R1.1 840,728 835,733 830.03,733 823,740.03 823,771 821.5,772.5 ; U1.7 807.5,758.5 821.5,772.5 ; U1.8 821.5,772.5
  Top1 w10: USB1.A4 895.39,415 931.96,415 945,428.04 945,440 ; USB1.B9 934.42,429.42 945,440 ; USB1.A9 893.69,617.49 935.47,617.49 946.38,606.58 ; 945.42,606.58 USB1.B4 946.38,606.58 ; U2.1 967.61,177.6 960,185.21 960,245 967.4,252.4 U2.3 1019.57,256.88 1019.57,279.21 1005,293.79 1005,345 980,370 980,448 982,450 982,477 ; 945,440 982,477 ; 946.38,606.58 953.5,599.46 953.5,598.5 v1(963.71,588.29) 982,570 982,477
  Bottom4 w10: U6.A2 700.74,849.26 755,795 755,755.46 781,729.45 781,723.82 783.17,721.65 783.17,711.83 v1@814,681 ; v1(815,680) 850,680 870,700 870,795.86 ; C12.1 870,795.86 ; v1(963.71,588.29) 985.42,610 ; R17.1 985.42,610 ; 870,795.86 875.86,790 960,790 995,755 995,619.58 985.42,610
pads on no net: A1. CON1.0 D1.2 J1.1 J1.8 U1.1 U1.2 U1.6 U1.10 U1.11 U1.12 U1.13 U1.14 U1.15 U1.16 U1.17 U1.18 U1.19 U1.20 U1.21 U1.22 U1.23 U1.27 U3. U3.2 U3.3 U3.4 U3.5 U3.6 U3.7 U3.12 U3.14 U3.15 U3.16 U3.17 U3.19 U3.21 U3.22 U4.26 U4.44 U4.45 U4.47 U4.48 USB1.0 USB1.A5 USB1.A8 USB1.B5 USB1.B8
copper on no net:
  other v1: 665,510 700,510 735,510 665,545 700,545 735,545

## Polygon pours and split planes (outlines as drawn)
GND on Top1 (solid, remove dead copper, pour order 48): 30,655 235,655 240,650 255,665 255,935 300,980 1030,980 1080,930 1080,750 1075,745 1100,720 1155,720 1160,725 1160,315 1100,315 1075,290 1065,290 1065,95 1070,90 1030,50 280,50 275,45 255,65 255,350 240,365 240,375 30,375
no net on Top1 (solid, remove dead copper, pour order 32): -180,1085
GND on Top1 "Top1-GND 1" (solid, pour order 8): 1430,1030
GND on Bottom4 (solid, remove dead copper, pour order 46): 35,649.82 40.18,655 245,655 260,670 260,940 315,995 325,985 1025,985 1080,930 1070,920 1070,745 1095,720 1160,720 1160,318 1157,315 1095,315 1070,290 1070,95 1025,50 275,50 275,55 255,75 260,80 260,355 240,375 30,375

## Keep-outs
Keep-Out Layer:
  lines w10: 232.4,379.6 cw(c232.4,347) 265,347 265,72.07 ccw(c282.07,72.07) 282.07,55 990,55 ccw(c990,135) 1070,135 1070,282.4 ; 232.4,380 35,380 35,649.82 232.4,649.82 ; 232.4,649.4 ccw(c232.4,682) 265,682 ; 264.82,682 264.82,900 ; 265,900 cw(c345,900) 345,980 990,980 cw(c990,900) 1070,900 1070,752.5 ; 1069.9,752.5 ccw(c1102.5,752.5) 1102.5,719.9 ; 1070.4,282.4 cw(c1103,282.4) 1103,315 1157,315 1157,720 1102.5,720

## Other copper
Top1:
  pour cut-out: 250,200 515,200 545,170 545,35 250,35
Bottom4:
  region net GND: 570,520
  pour cut-out: 250,200 516.25,200 545,170 545,35 250,35

## Silkscreen, mask and mechanical layers (free items; w line width, h text height)
Bottom Overlay:
  text "-" at 1040,880 h20
  text "+" at 1040,815 h20
Drill Drawing:
  circle w10: c110.62,1982.28 r33.33
  lines w10: 77.29,1498.94 110.62,1515.61 143.96,1498.94 127.29,1532.28 143.96,1565.61 110.62,1548.94 77.29,1565.61 93.96,1532.28 77.29,1498.94 ; 77.29,1715.61 143.96,1715.61 110.62,1648.94 77.29,1715.61 ; 77.29,1798.94 143.96,1798.94 143.96,1865.61 77.29,1865.61 77.29,1798.94 ; 77.29,2115.61 93.96,2115.61 110.62,2098.94 127.29,2115.61 143.96,2115.61 127.29,2132.28 143.96,2148.94 127.29,2148.94 110.62,2165.61 93.96,2148.94 77.29,2148.94 93.96,2132.28 77.29,2115.61
  lines w15: 17.5,1453.94 13215.79,1453.94 ; 17.5,2203.94 13215.79,2203.94 ; 568.38,1303.94 568.38,2353.94 ; 1148.22,1303.94 1148.22,2353.94 ; 2247.9,1303.94 2247.9,2353.94 ; 2753.78,1303.94 2753.78,2353.94 ; 3487.58,1303.94 3487.58,2353.94 ; 4677.24,1303.94 4677.24,2353.94 ; 5267.08,1303.94 5267.08,2353.94 ; 6012.88,1303.94 6012.88,2353.94 ; 7202.53,1303.94 7202.53,2353.94 ; 8056.3,1303.94 8056.3,2353.94 ; 9389.9,1303.94 9389.9,2353.94 ; 10723.51,1303.94 10723.51,2353.94 ; 11813.19,1303.94 11813.19,2353.94 ; 17.5,1303.94 13215.79,1303.94 13215.79,2353.94 17.5,2353.94 17.5,1303.94
  text "Symbol" at 107.5,2248.94 h72
  text "Count" at 613.38,2248.94 h72
  text "Hole Size" at 1193.22,2248.94 h72
  text "Plated" at 2292.9,2248.94 h72
  text "Hole Type" at 2798.78,2248.94 h72
  text "Drill Layer Pair" at 3532.58,2248.94 h72
  text "Via/Pad" at 4722.24,2248.94 h72
  text "Pad Shape" at 5312.08,2248.94 h72
  text "Template" at 6057.88,2248.94 h72
  text "Description" at 7247.53,2248.94 h72
  text "Hole Tolerance (+)" at 8101.3,2248.94 h72
  text "Hole Tolerance (-)" at 9434.9,2248.94 h72
  text "Hole Length" at 10768.51,2248.94 h72
  text "Routed Path Length" at 11858.19,2248.94 h72
  text "1" at 613.38,2098.94 h60
  text "8.00mil (0.203mm)" at 1193.22,2098.94 h60
  text "PTH" at 2292.9,2098.94 h60
  text "Round" at 2798.78,2098.94 h60
  text "Top1 - Bottom4" at 3532.58,2098.94 h60
  text "Via" at 4722.24,2098.94 h60
  text "Rounded" at 5312.08,2098.94 h60
  text "v41h20" at 6057.88,2098.94 h60
  text "-" at 10768.51,2098.94 h60
  text "-" at 11858.19,2098.94 h60
  text "2" at 613.38,1948.94 h60
  text "23.62mil (0.600mm)" at 1193.22,1948.94 h60
  text "PTH" at 2292.9,1948.94 h60
  text "Slot" at 2798.78,1948.94 h60
  text "Top1 - Bottom4" at 3532.58,1948.94 h60
  text "Pad" at 4722.24,1948.94 h60
  text "Rounded" at 5312.08,1948.94 h60
  text "r160_100h60_120r100" at 6057.88,1948.94 h60
  text "47.24mil (1.200mm)" at 10768.51,1948.94 h60
  text "23.62mil (0.600mm)" at 11858.19,1948.94 h60
  text "2" at 613.38,1798.94 h60
  text "23.62mil (0.600mm)" at 1193.22,1798.94 h60
  text "PTH" at 2292.9,1798.94 h60
  text "Slot" at 2798.78,1798.94 h60
  text "Top1 - Bottom4" at 3532.58,1798.94 h60
  text "Pad" at 4722.24,1798.94 h60
  text "Rounded" at 5312.08,1798.94 h60
  text "r210_100h60_170r100" at 6057.88,1798.94 h60
  text "66.93mil (1.700mm)" at 10768.51,1798.94 h60
  text "43.31mil (1.100mm)" at 11858.19,1798.94 h60
  text "2" at 613.38,1648.94 h60
  text "25.59mil (0.650mm)" at 1193.22,1648.94 h60
  text "PTH" at 2292.9,1648.94 h60
  text "Round" at 2798.78,1648.94 h60
  text "Top1 - Bottom4" at 3532.58,1648.94 h60
  text "Pad" at 4722.24,1648.94 h60
  text "Rounded" at 5312.08,1648.94 h60
  text "c65h65" at 6057.88,1648.94 h60
  text "-" at 10768.51,1648.94 h60
  text "-" at 11858.19,1648.94 h60
  text "114" at 613.38,1498.94 h60
  text "10.00mil (0.254mm)" at 1193.22,1498.94 h60
  text "PTH" at 2292.9,1498.94 h60
  text "Round" at 2798.78,1498.94 h60
  text "Top1 - Bottom4" at 3532.58,1498.94 h60
  text "Via" at 4722.24,1498.94 h60
  text "Rounded" at 5312.08,1498.94 h60
  text "(Mixed)" at 6057.88,1498.94 h60
  text "-" at 10768.51,1498.94 h60
  text "-" at 11858.19,1498.94 h60
  text "121 Total" at 613.38,1348.94 h60
  text "Slot definitions :" at 107.5,1203.97 h60
  text "Routed Path Length" at 1140.19,1203.97 h60
  text "= Calculated from tool start centre position to tool end centre position." at 2242.86,1203.97 h60
  text "Hole Length" at 1140.19,1103.99 h60
  text "= Routed Path Length + Tool Size = Slot length as defined in the PCB layout" at 1832.99,1103.99 h60